# EAGLE board pled_development_board (EAGLE 6.6.0)
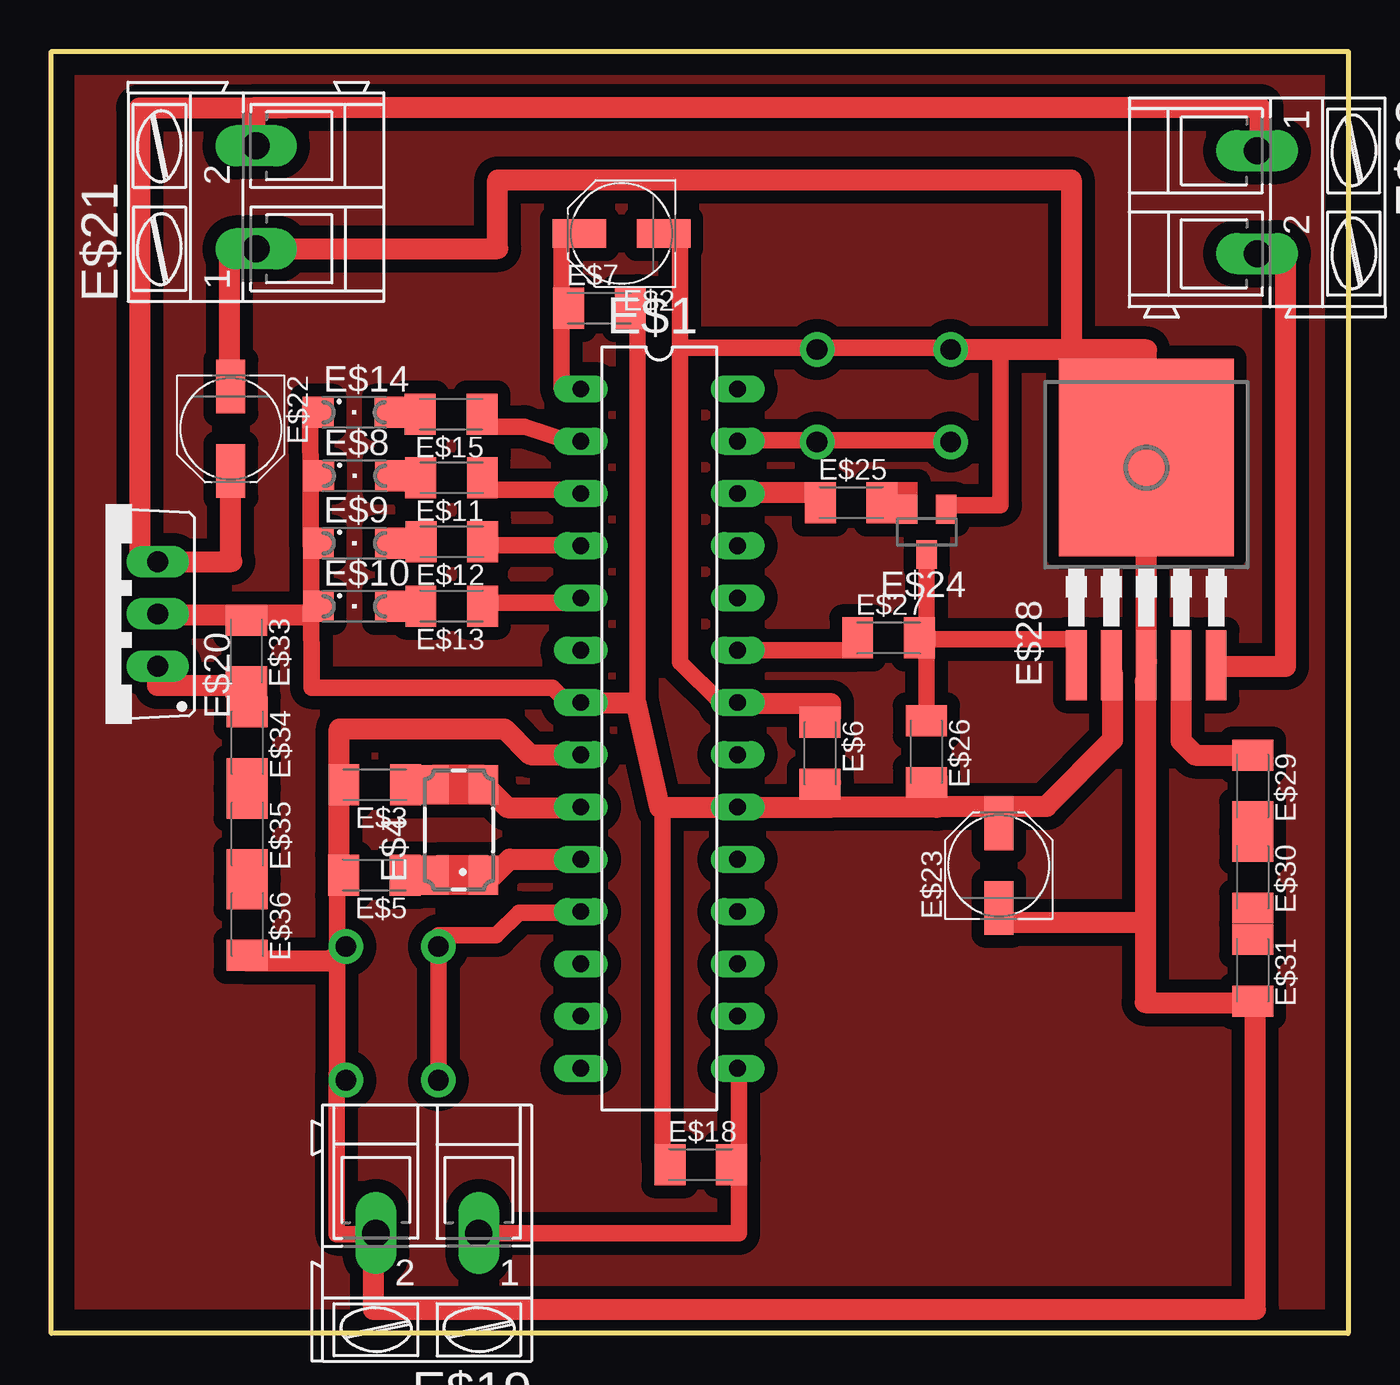
[diagram p0: board, top side]
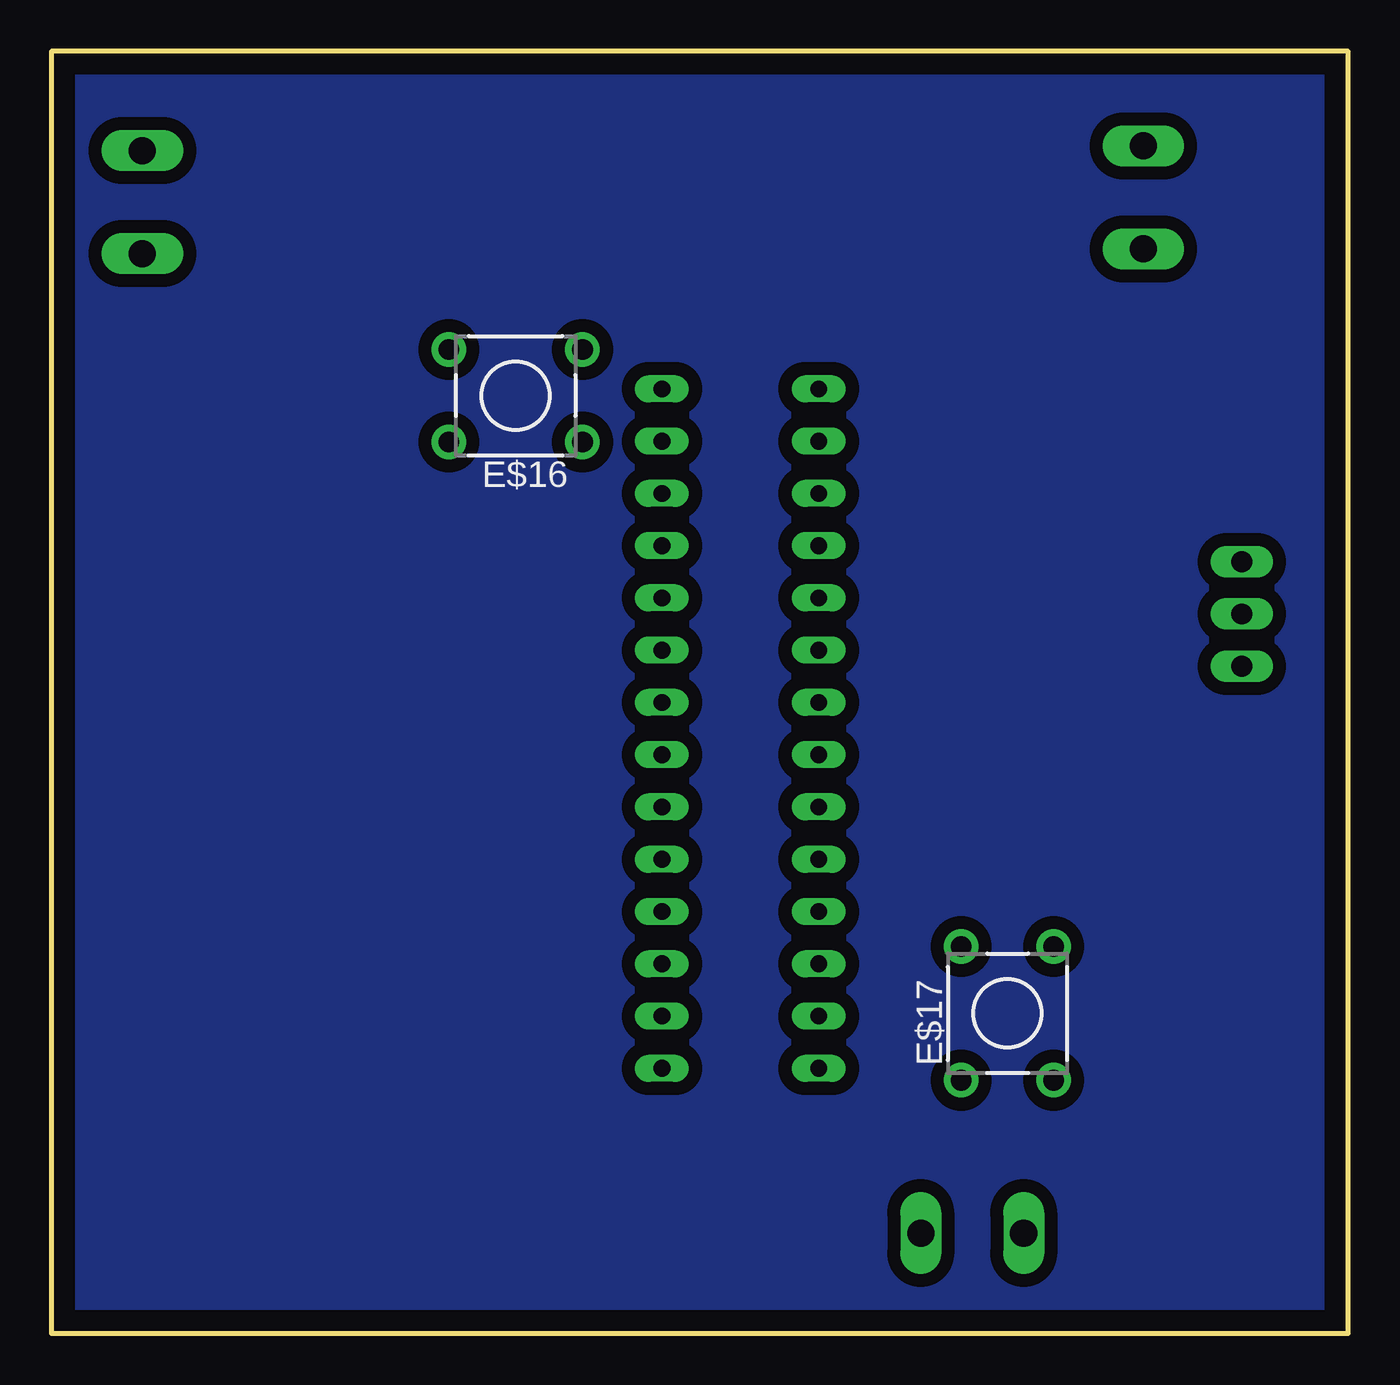
[diagram p1: board, bottom side, seen from below]

Size 63.04 x 62.3 mm. Coordinates in mm from the lower left corner, seen from the top.
Outline: 0,0 0,62.3 63.04,62.3 63.04,0 0,0
Copper layers (1*16): Top 0.035mm / dielectric 1.5mm / Bottom 0.035mm
Design rules "default *": minimum track width 10mil, minimum drill 24mil, track to track 25mil, track to pad 25mil, pad to pad 25mil, via to via 25mil, smd to smd 25mil, copper to edge 40mil, drill to drill 8mil, minimum pad ring 10mil, minimum via ring 8mil, stop-mask expansion 4mil, vias tented up to drill 0mil, thermal gap 10mil

## Footprints (pad centres in the part's own frame; a part is rotated, then mirrored left to right if it is on the bottom)
DIL28-3 = drill 0.813 long: 1 -16.51,-3.81; 2 -13.97,-3.81; 3 -11.43,-3.81; 4 -8.89,-3.81; 5 -6.35,-3.81; 6 -3.81,-3.81; 7 -1.27,-3.81; 8 1.27,-3.81; 9 3.81,-3.81; 10 6.35,-3.81; 11 8.89,-3.81; 12 11.43,-3.81; 13 13.97,-3.81; 14 16.51,-3.81; 15 16.51,3.81; 16 13.97,3.81; 17 11.43,3.81; 18 8.89,3.81; 19 6.35,3.81; 20 3.81,3.81; 21 1.27,3.81; 22 -1.27,3.81; 23 -3.81,3.81; 24 -6.35,3.81; 25 -8.89,3.81; 26 -11.43,3.81; 27 -13.97,3.81; 28 -16.51,3.81
PANASONIC_C = smd 2.6 x 1.4: + 2.05,0; - -2.05,0
C1206K = smd 1.5 x 2: 1 -1.5,0; 2 1.5,0
CTS406 = smd 1.9 x 1.4: 1 -2.2,-1.2; 2 2.2,-1.2; 3 2.2,1.2; 4 -2.2,1.2
SML1206 = smd 1.5 x 1.5: A 1.75,0; C -1.75,0
TL1105 = drill 1 pad 1.676: 1 -2.25,3.25; 2 2.25,3.25; 3 -2.25,-3.25; 4 2.25,-3.25
AK300/2 = drill 1.321 long: 1 -2.515,0; 2 2.489,0
TO220V = drill 1.016 long: 1 -2.54,-2.54; 2 0,-2.54; 3 2.54,-2.54
SOT23 = smd 1 x 1.4: 1 -0.95,-1.1; 2 0.95,-1.1; 3 0,1.1
TO263-51 = smd 1 x 3.4: 1 -3.4,-6.6; 2 -1.7,-6.6; 3 0,-6.6; 4 1.7,-6.6; 5 3.4,-6.6 | smd 8.5 x 9.6: 6 0,3.5

## Placement (x,y rotation side)
E$1  [DIL28-3]  29.55,29.39 270 top
E$2  [PANASONIC_C]  27.72,53.45 180 top
E$3  [C1206K]  15.72,26.66 180 top
E$4  [CTS406]  19.81,24.46 90 top
E$5  [C1206K]  15.7,22.27 180 top
E$6  [C1206K]  37.37,28.19 270 top
E$7  [C1206K]  26.64,49.82 0 top
E$8  [SML1206]  14.74,41.67 0 top
E$9  [SML1206]  14.73,38.4 0 top
E$10  [SML1206]  14.73,35.33 0 top
E$11  [C1206K]  19.45,41.58 180 top
E$12  [C1206K]  19.47,38.47 180 top
E$13  [C1206K]  19.46,35.34 180 top
E$14  [SML1206]  14.72,44.76 0 top
E$15  [C1206K]  19.43,44.67 180 top
E$16  [TL1105]  40.47,45.57 90 bottom
E$17  [TL1105]  16.56,15.55 0 bottom
E$18  [C1206K]  31.57,8.2 0 top
E$19  [AK300/2]  18.26,4.87 180 top
E$20  [TO220V]  2.63,34.96 90 top
E$21  [AK300/2]  9.95,55.22 90 top
E$22  [PANASONIC_C]  8.72,43.96 270 top
E$23  [PANASONIC_C]  46.06,22.73 90 top
E$24  [SOT23]  42.56,38.95 180 top
E$25  [C1206K]  38.88,40.37 0 top
E$26  [C1206K]  42.54,28.27 270 top
E$27  [C1206K]  40.7,33.8 0 top
E$28  [TO263-51]  53.23,39.07 0 top
E$29  [C1206K]  58.4,26.6 270 top
E$30  [C1206K]  58.4,22.17 270 top
E$31  [C1206K]  58.4,17.64 270 top
E$32  [AK300/2]  58.62,54.96 270 top
E$33  [C1206K]  9.48,33.16 270 top
E$34  [C1206K]  9.52,28.7 270 top
E$35  [C1206K]  9.52,24.27 270 top
E$36  [C1206K]  9.52,19.87 270 top

## Library data of the parts
E$1 = atmel
E$2 E$3 E$5-E$7 E$11-E$13 E$15 E$18 E$22 E$23 E$25-E$27 E$29-E$31 E$33-E$36 = rcl
E$4 = crystal
E$8-E$10 E$14 E$24 = led
E$16 E$17 = switch
E$19 E$21 E$32 = con-ptr500
E$20 = transistor-pnp
E$28 = micro-siemens

## Tracks (layer width: path | path; a pad name or v marks a point on that pad's centre or on a via)
S$1
  Top 1.016: 25.74,25.55 22.17,25.55 21.33,26.39
S$2
  Top 1.016: 25.79,23.05 22.28,23.05 21.46,22.23
S$3
  Top 1.016: 25.76,28.13 23.28,28.13 22.03,29.38 13.99,29.38 13.99,21.98
S$4
  Top 0.813: 14.44,12.34 13.88,12.34 13.88,22.97
S$5
  Top 1.016: 33.42,30.61 37.88,30.61 37.88,29.95
S$6
  Top 1.016: 25.77,30.61 28.42,30.61 29.57,25.56 37.88,25.56 37.88,26.76
S$7
  Top 0.813: 28.29,30.7 28.5,30.7 28.5,50.43
S$8
  Top 0.813: 25.73,45.94 24.8,45.94 24.8,53.63
S$9
  Top 0.813: 32.52,30.66 30.57,32.61 30.57,53.66
S$10
  Top 0.813: 25.71,40.8 25.52,40.99 20.81,40.99
S$11
  Top 0.813: 21.03,38.29 25.73,38.29
S$12
  Top 0.813: 25.78,35.78 25.51,35.51 20.87,35.51
S$13
  Top 0.813: 25.14,30.61 24.37,31.38 12.65,31.38 12.59,45.03
S$14
  Top 0.813: 25.23,43.32 23,44.07 21.13,44.07
S$15
  Top 0.813: 33.37,43.4 43.78,43.4
S$16
  Top 0.813: 30.68,47.9 43.78,47.9
S$17
  Top 0.813: 18.82,11.97 18.82,19.34 21.62,19.34 22.73,20.45 25.96,20.45
S$18
  Top 0.813: 29.72,8.42 29.72,25.67
S$19
  Top 0.813: 33.43,12.85 33.43,8.49 33.39,8.53
S$20
  Top 0.813: 15.83,4.82 13.87,4.82 13.87,12.62
S$21
  Top 0.813: 20.79,4.86 33.42,4.86 33.42,8.6
S$22
  Top 1.016: 33.5,40.87 37.44,40.87
S$23
  Top 0.813: 43.58,40.25 46.14,40.25 46.14,47.91 43.63,47.91
S$24
  Top 0.813: 42.55,37.91 42.55,29.64
S$25
  Top 1.016: 43.06,27.01 43.05,25.56 36.68,25.56
S$26
  Top 0.813: 33.3,33.19 39.03,33.19 39.03,33.23
S$27
  Top 0.813: 42.39,33.73 49.92,33.73 49.92,33.51
S$28
  Top 1.016: 42.5,25.61 48.38,25.61
S$29
  Top 1.016: 53.24,32.66 53.24,47.79 43.69,47.79
S$30
  Top 1.016: 51.59,32.04 51.59,28.84 48.37,25.62
S$31
  Top 1.016: 15.65,4.76 15.65,1.16 58.54,1.16 58.54,16.36
S$32
  Top 1.016: 57.1,32.42 60.01,32.42 60.01,52.25
S$33
  Top 1.016: 49.58,46.73 49.58,56.06 21.7,56.06 21.7,52.72 8.66,52.72 8.66,45.98
S$34
  Top 1.016: 9.9,57.58 9.9,59.58 58.75,59.58 58.75,57.41
S$35
  Top 1.016: 8.71,37.55 8.71,42.2
S$36
  Top 1.016: 11.37,59.54 4.28,59.54 4.28,37.5 8.77,37.5
S$37
  Top 1.016: 5.19,34.93 12.49,34.93
S$38
  Top 1.016: 5.15,32.46 5.15,31.49 9.35,31.49
S$39
  Top 1.016: 54.92,31.67 54.92,28.79 55.61,28.1 58.01,28.1 58.04,28.07
S$40
  Top 1.016: 53.18,31.67 53.18,16.07 58.52,16.07
S$41
  Top 1.016: 46.1,19.99 53.16,19.99 53.16,20.27
S$42
  Top 1.016: 9.51,18.1 13.64,18.1 13.64,18.17
S$43
  pour Bottom: 0.01,0.01 0.01,62.29 60.93,62.29 63.04,62.29 63.04,0.02 63.04,0.01
S$44
  pour Top: 0.03,62.31 63.05,62.31 63.05,5.95 63.05,-0.02 0.83,-0.02 0.03,-0.02
(copper drawn outside any net)
  shapes: Top area x3